# Altium PCB touch-24-v5.PcbDoc
Units mm, origin at the board's own origin, x right, y up, seen from the top; angles counter-clockwise.
Board outline 151 x 86.38 mm, 2 copper layers (Top Layer, Bottom Layer); 93 components, 79 nets, 232 pads, 43 vias.
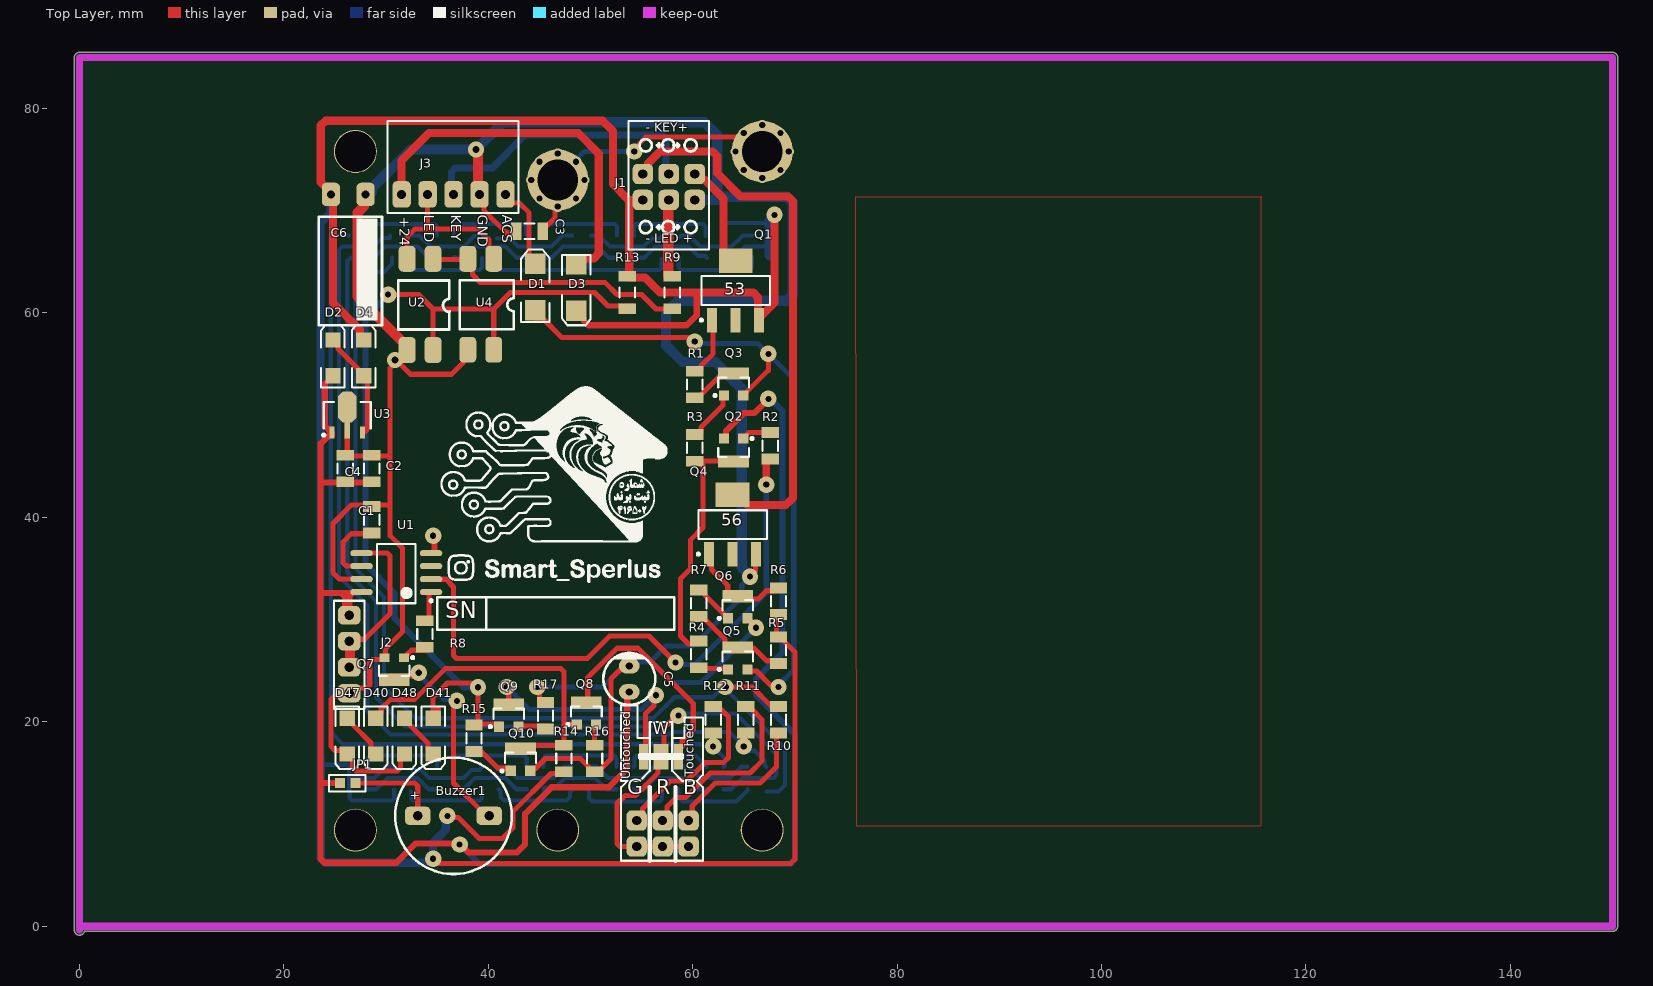
[diagram p0: Top Layer view]
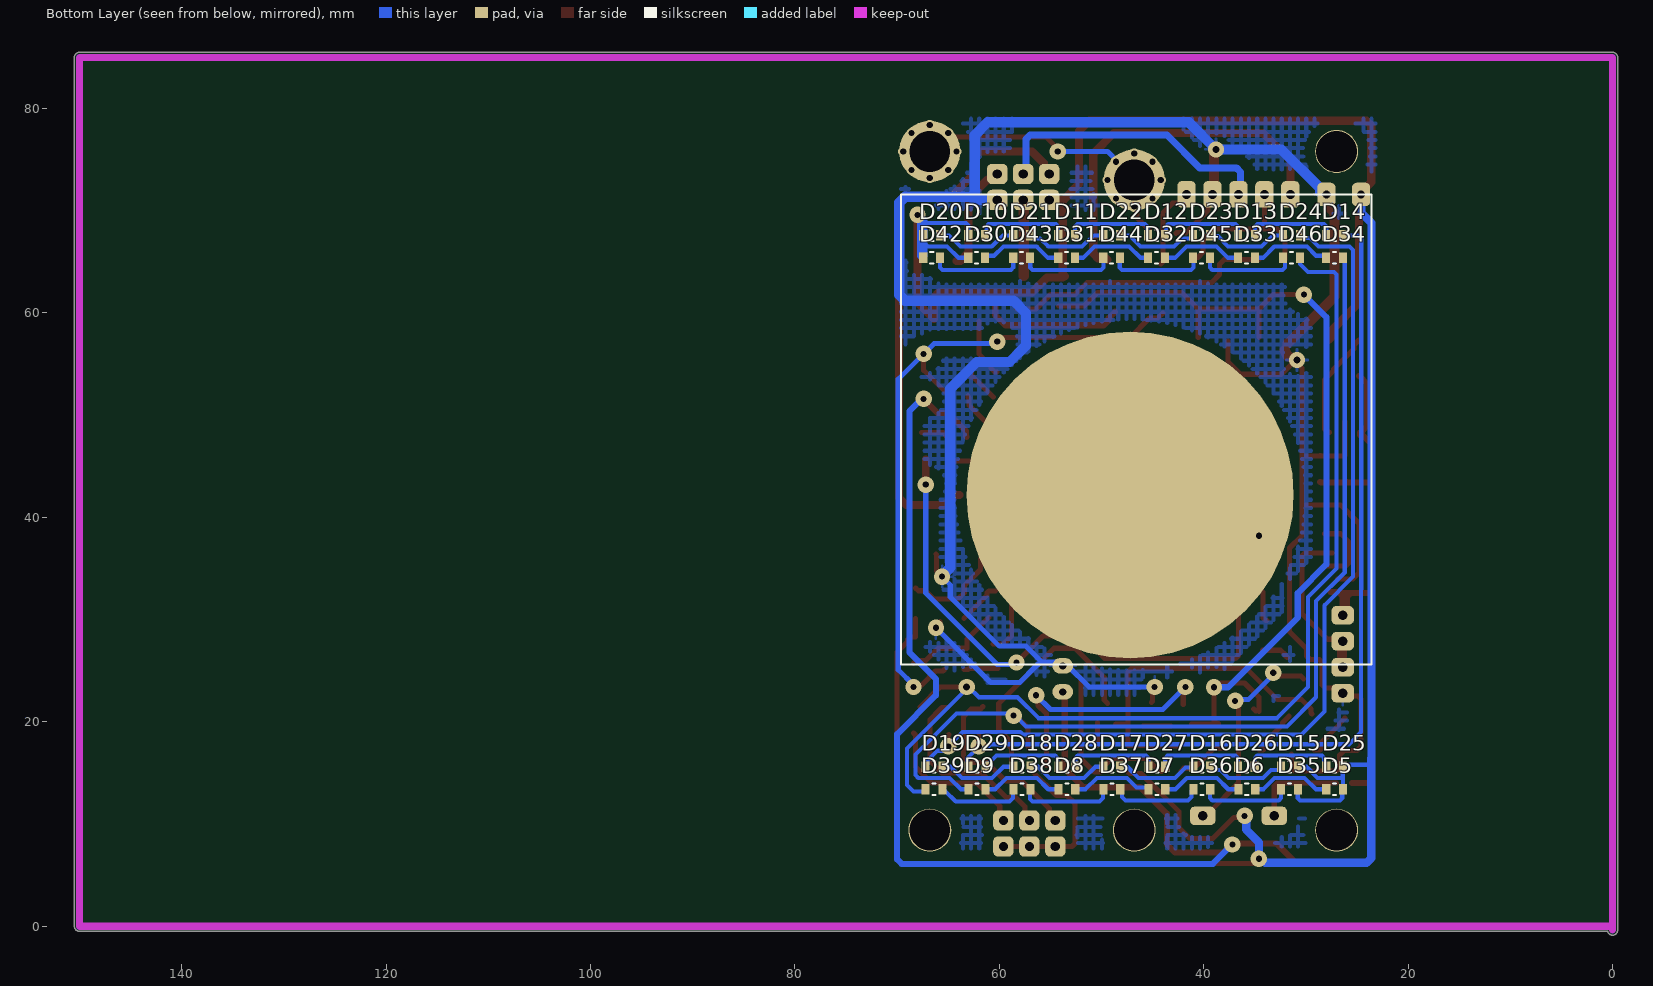
[diagram p1: Bottom Layer view, seen from below]

## Layer stack, top to bottom
Top Solder: solder mask 0.0102, Solder Resist, Dk 3.5
Top Layer: signal copper 0.0356
Dielectric 1: dielectric 0.32, FR-4, Dk 4.8
Bottom Layer: signal copper 0.0356
Bottom Solder: solder mask 0.0102, Solder Resist, Dk 3.5

## Board outline
-0.5,-0.381 -0.5,85 cw(c0,85) 0,85.5 150,85.5 cw(c150,85) 150.5,85 150.5,0 cw(c150,0) 150,-0.5 0.486,-0.5 cw(c0,-0.381)

## Design rules (kind name [scope] priority, off if disabled: settings)
Clearance Clearance_1 [InPolygon] p1: gap=1 ignorepadtopadclearanceinfootprint=FALSE
Clearance [All] p2: gap=0.4 ignorepadtopadclearanceinfootprint=FALSE
PolygonConnect [All] p1: connectstyle=Relief reliefconductorwidth=0.254 reliefentries=4 polygonreliefangle="90 Angle" airgapwidth=0.254
RoutingLayers [All] p1: top layer_v5=FALSE bottom layer_v5=TRUE
RoutingVias [All] p1: holewidth=0.711 width=2.5 viastyle="Through Hole" minholewidth=0.711 minwidth=1.27 maxholewidth=0.711 maxwidth=2
SolderMaskExpansion [All] p1: expansion=0.102 istentingtop=FALSE
Width [All] p1: maxlimit=3 minlimit=0.4 preferedwidth=1
29 further rules are at their usual default settings.

## Classes and differential pairs
component class touch-24-v5: Buzzer1 C1 C2 C3 C4 C5 C6 D1 D2 D3 D4 D5 D6 D7 D8 D9 D10 D11 D12 D13 D14 D15 D16 D17 D18 D19 D20 D21 D22 D23 D24 D25 D26 D27 D28 D29 D30 D31 D32 D33 D34 D35 D36 D38 D40 D41 D42 D44 D46 D47 J1 J3 J8 JP1 JP? P5 P7 Q1 Q2 Q3 Q4 Q5 Q6 Q7 Q8 Q9 Q10 R1 R2 R3 R4 R5 R6 R7 R8 R9 R10 R13 R14 R15 R16 R17 R22 U1 U2 U3 U4 U17

## Components (designator, comment, footprint, x,y, rotation, side; value= is the part's Value field where it differs from the comment)
Buzzer1 "Buzzer" BUZZER 36.6,10.8 r0 top
C1 "=Value" "CAP 1206" 26,44.8 r270 top
C2 "=Value" "CAP 1206" 28.6,44.8 r270 top
C3 "=Value" "CAP 1206" 44,68 r0 top
C4 "=Value" "CAP 1206" 28.6,39.8 r270 top
C5 "=Value" ELEC-CAP-RAD10-20 53.8,24.2 r270 top
C6 "=Value" ELEC-CAP-RAD15-30 26.4,69.6 r180 top
D1 "D Tunnel1" 3.2X1.6X1.1#1 44.6,62 r90 top
D2 "D Tunnel1" 3.2X1.6X1.1#2 24.8,55.6 r90 top
D3 "D Tunnel1" 3.2X1.6X1.1#3 48.6,62.75 r270 top
D4 "D Tunnel1" 3.2X1.6X1.1#2 27.8,55.6 r90 top
D5 "LED2" "RES 0805 (2012X06L)" 27.2,13.4 r0 bottom
D6 "LED2" "RES 0805 (2012X06L)" 35.8,13.4 r0 bottom
D7 "LED2" "RES 0805 (2012X06L)" 44.6,13.4 r0 bottom
D8 "LED2" "RES 0805 (2012X06L)" 53.4,13.4 r0 bottom
D9 "LED2" "RES 0805 (2012X06L)" 62.2,13.4 r0 bottom
D10 "LED2" "RES 0805 (2012X06L)" 62.2,67.6 r180 bottom
D11 "LED2" "RES 0805 (2012X06L)" 53.4,67.6 r180 bottom
D12 "LED2" "RES 0805 (2012X06L)" 44.6,67.6 r180 bottom
D13 "LED2" "RES 0805 (2012X06L)" 35.8,67.6 r180 bottom
D14 "LED2" "RES 0805 (2012X06L)" 27.2,67.6 r180 bottom
D15 "LED2" "RES 0805 (2012X06L)" 31.612,15.6 r0 bottom
D16 "LED2" "RES 0805 (2012X06L)" 40.2,15.6 r0 bottom
D17 "LED2" "RES 0805 (2012X06L)" 49,15.6 r0 bottom
D18 "LED2" "RES 0805 (2012X06L)" 57.8,15.6 r0 bottom
D19 "LED2" "RES 0805 (2012X06L)" 66.4,15.6 r0 bottom
D20 "LED2" "RES 0805 (2012X06L)" 66.6,67.6 r180 bottom
D21 "LED2" "RES 0805 (2012X06L)" 57.8,67.6 r180 bottom
D22 "LED2" "RES 0805 (2012X06L)" 49,67.6 r180 bottom
D23 "LED2" "RES 0805 (2012X06L)" 40.2,67.6 r180 bottom
D24 "LED2" "RES 0805 (2012X06L)" 31.4,67.6 r180 bottom
D25 "LED2" "RES 0805 (2012X06L)" 27.2,15.6 r0 bottom
D26 "LED2" "RES 0805 (2012X06L)" 35.838,15.6 r0 bottom
D27 "LED2" "RES 0805 (2012X06L)" 44.6,15.6 r0 bottom
D28 "LED2" "RES 0805 (2012X06L)" 53.4,15.6 r0 bottom
D29 "LED2" "RES 0805 (2012X06L)" 62.2,15.6 r0 bottom
D30 "LED2" "RES 0805 (2012X06L)" 62.2,65.4 r180 bottom
D31 "LED2" "RES 0805 (2012X06L)" 53.4,65.4 r180 bottom
D32 "LED2" "RES 0805 (2012X06L)" 44.6,65.4 r180 bottom
D33 "LED2" "RES 0805 (2012X06L)" 35.8,65.4 r180 bottom
D34 "LED2" "RES 0805 (2012X06L)" 27.2,65.4 r180 bottom
D35 "LED2" "RES 0805 (2012X06L)" 31.612,13.4 r0 bottom
D36 "LED2" "RES 0805 (2012X06L)" 40.2,13.4 r0 bottom
D37 "LED2" "RES 0805 (2012X06L)" 49,13.4 r0 bottom
D38 "LED2" "RES 0805 (2012X06L)" 57.8,13.4 r0 bottom
D39 "LED2" "RES 0805 (2012X06L)" 66.4,13.4 r0 bottom
D40 "D Tunnel1" 3.2X1.6X1.1#2 29,18.6 r270 top
D41 "D Tunnel1" 3.2X1.6X1.1#2 34.6,18.6 r270 top
D42 "LED2" "RES 0805 (2012X06L)" 66.6,65.4 r180 bottom
D43 "LED2" "RES 0805 (2012X06L)" 57.8,65.4 r180 bottom
D44 "LED2" "RES 0805 (2012X06L)" 49,65.4 r180 bottom
D45 "LED2" "RES 0805 (2012X06L)" 40.2,65.4 r180 bottom
D46 "LED2" "RES 0805 (2012X06L)" 31.4,65.4 r180 bottom
D47 "D Tunnel1" 3.2X1.6X1.1#2 26.2,18.6 r270 top
D48 "D Tunnel1" 3.2X1.6X1.1#2 31.8,18.6 r270 top
J1 "Header3X2" "HEADER 3X2" 55.12,73.6 r0 top
J2 "Header4X1" "HEADER 4X1" 26.4,30.42 r270 top
J3 "Header5X1" "HEADER 5X1" 31.52,71.6 r0 top
J4 "Header3X2" "HEADER 3X2" 59.6,7.8 r180 top
JP1 "Jumper" "Header 2X1" 26.2,14 r180 top
JP2 "Jumper Selector" "Jumper Selector"#1 59.38,15.8 r180 top
JP3 "Jumper Selector" "Jumper Selector"#2 59.44,17.4 r180 top
Q1 "MOSFET-P4" SOT223_N 64.2,62.2 r90 top
Q2 "PNP" SOT-23B_N 64,46.6 r270 top
Q3 "QNPN" SOT-23B_L#1 64,53 r90 top
Q4 "MOSFET-P4" SOT223_N 63.9,39.3 r90 top
Q5 "QNPN" SOT-23B_L#1 64.4,26.2 r90 top
Q6 "QNPN" SOT-23B_L#1 64.4,31.2 r90 top
Q7 "QNPN" SOT-23B_L#2 30.8,25.2 r270 top
Q8 "QNPN" SOT-23B_L#1 49.6,20.8 r90 top
Q9 "QNPN" SOT-23B_L#1 42,20.6 r90 top
Q10 "QNPN" SOT-23B_L#1 43.15,16.275 r90 top
R1 "10K" "RES 1206 (3216X08L)"#1 60.2,53 r90 top
R2 "10K" "RES 1206 (3216X08L)"#1 67.6,47 r90 top
R3 "10K" "RES 1206 (3216X08L)"#1 60.2,46.8 r90 top
R4 "10K" "RES 1206 (3216X08L)"#1 60.6,26.6 r270 top
R5 "10K" "RES 1206 (3216X08L)"#1 68.4,27 r90 top
R6 "10K" "RES 1206 (3216X08L)"#1 68.4,31.8 r90 top
R7 "10K" "RES 1206 (3216X08L)"#1 60.6,31.6 r90 top
R8 "10K" "RES 1206 (3216X08L)"#1 33.8,28.6 r270 top
R9 "10K" "RES 1206 (3216X08L)"#2 58,62 r270 top
R10 "10K" "RES 1206 (3216X08L)"#1 68.4,20.2 r90 top
R11 "10K" "RES 1206 (3216X08L)"#1 65.2,20.2 r270 top
R12 "10K" "RES 1206 (3216X08L)"#1 62,20.2 r270 top
R13 "10K" "RES 1206 (3216X08L)"#2 53.6,62 r90 top
R14 "10K" "RES 1206 (3216X08L)"#1 47.4,16.4 r270 top
R15 "10K" "RES 1206 (3216X08L)"#1 38.6,18.4 r270 top
R16 "10K" "RES 1206 (3216X08L)"#1 50.4,16.4 r90 top
R17 "10K" "RES 1206 (3216X08L)"#1 45.6,20.6 r270 top
U1 "ATtiny15L-1SC" 8S2_N 31,34.6 r180 top
U2 "PC817" DIP4#1 34.6,64.6 r270 top
U3 "LM1117MP-3.3" SOT89L 26.2,50 r90 top
U4 "PC817" DIP4#2 40.54,64.62 r270 top

## Footprints (in the part's own frame and the unit in brackets; to place one, negate y for a bottom-side part, rotate by r counter-clockwise, add the part's x,y. Pads: shape width x height; smd on the part's side, far side on the other; paste and mask are expansions set on the pad)
3.2X1.6X1.1#1 [mm] "SMT LED; 2 Flat Leads"
  rect 2x2 smd: 1(-1.75,0) 2(2.8,0)
  silkscreen extent -2.9,-1.4 4.2,1.4
3.2X1.6X1.1#2 [mm] "SMT LED; 2 Flat Leads"
  rect 1.5x1.5 smd: 1(-1.75,0) 2(1.75,0)
  silkscreen extent -2.9,-1.15 3.2,1.15
3.2X1.6X1.1#3 [mm] "SMT LED; 2 Flat Leads"
  rect 2x2 smd: 1(-2,0) 2(2.55,0)
  silkscreen extent -2.9,-1.4 3.95,1.4
8S2_N [mm] "SOP, 8-Leads, Body 5.3x5.3mm, Pitch 1.27mm, IPC Medium Density"
  oval 2.2x0.6 smd: 1(-3.4,1.905) 2(-3.4,0.635) 3(-3.4,-0.635) 4(-3.4,-1.905) 5(3.4,-1.905) 6(3.4,-0.635) 7(3.4,0.635) 8(3.4,1.905)
  silkscreen extent -3.52,-2.8 1.9,3, body extent -2.73,-2.75 2.73,2.75, height 2.16
BUZZER [mm] "BUZZER"
  rrect50% 2.5x1.8 hole 0.9: 1(-3.5,0) 2(3.5,0)
  silkscreen extent -5.7,-5.7 5.7,5.7
"CAP 1206" [mm]
  rect 1.05x1.7 smd: 1(-1.27,0) 2(1.326,0)
  silkscreen extent -0.47,-0.75 0.53,0.75, body extent -1.49,-0.77 1.55,0.75, height 0.75
DIP4#1 [mm]
  rrect50% 2.54x1.651 smd: 1(-0.7,0) 2(-0.7,-2.54) 3(8.22,-2.54) 4(8.22,0)
  silkscreen extent 1.42,-3.4 6.22,1.65, body extent -0.13,-3.56 7.75,1.03, height 4.3
DIP4#2 [mm]
  rrect50% 2.54x1.651 smd: 1(-0.68,0) 2(-0.68,-2.54) 3(8.22,-2.54) 4(8.22,0)
  silkscreen extent 1.42,-3.34 6.22,1.96, body extent -0.13,-3.56 7.75,1.03, height 4.3
ELEC-CAP-RAD10-20 [mil] "Chip Capacitor, 2-Leads, Body 3.2x1.6mm, IPC High Density, chip Tantalum"
  oval 60x80 hole 27.56: 1(-50,0) 2(50,0)
  silkscreen extent -100,-100 100,100, body extent -124,-124 124,124, height 404
ELEC-CAP-RAD15-30 [mil]
  rrect50% 70x90 hole 30: 1(-62.99,-78.74) 2(70.87,-78.74)
  silkscreen extent -108,16 -29,406, body extent -167,-167 167,167, height 609
"Header 2X1" [mm]
  rect 1x1 smd: 1(-0.8,0) 2(0.7,0)
  silkscreen extent -1.8,-0.8 1.8,0.8, body extent -2.54,-1.27 2.54,1.27, height 9.5
"HEADER 3X2" [mm]
  rrect50% 2x2 hole 0.9: 1(0,0) 2(0,-2.54) 3(2.54,0) 4(2.54,-2.54) 5(5.08,0) 6(5.08,-2.54)
  silkscreen extent -1.4,-7.4 6.48,5.2, body extent -1.3,-3.81 6.32,1.27, height 8.38
"HEADER 4X1" [mm]
  rrect50% 1.8x2.2 hole 0.9: 1(0,0) 2(2.54,0) 3(5.08,0) 4(7.62,0)
  silkscreen extent -1.43,-1.5 9.18,1.5, body extent -1.19,-1.22 8.97,1.32, height 8.38
"HEADER 5X1" [mm]
  rrect50% 1.8x2.6 hole 0.9: 1(0,0) 2(2.54,0) 3(5.08,0) 4(7.62,0) 5(10.16,0)
  silkscreen extent -1.4,-1.8 11.46,7.2, body extent -1.22,-1.19 11.48,1.35, height 8.38
"Jumper Selector"#1 [mm]
  rect 1.5x0.9 smd: 1(2.48,0)
  rect 0.9x0.9 smd: 2(0.78,0) 3(4.18,0)
  body extent -1.24,-1.27 6.38,1.27, height 10.16
"Jumper Selector"#2 [mm]
  rect 1.5x0.9 smd: 1(2.54,0)
  rect 0.9x0.9 smd: 2(0.84,0) 3(4.24,0)
  body extent -1.24,-1.27 6.38,1.27, height 10.16
"RES 0805 (2012X06L)" [mm] "Chip Resistor, 2-Leads, Body 2.0x1.3mm, IPC High Density _ (0.100 W)"
  rect 0.8x1 smd: 1(-0.838,0) 2(0.812,0)
  silkscreen extent -0.16,-0.55 0.14,0.55, body extent -1.03,-0.63 1,0.64, height 0.6
"RES 1206 (3216X08L)"#1 [mm] "Chip Resistor, 2-Leads, Body 3.2x1.6mm, IPC High Density _ (0.125 W)"
  rect 1.05x1.7 smd: 1(-1.295,0) 2(1.301,0)
  silkscreen extent -0.5,-0.75 0.5,0.75, body extent -1.52,-0.76 1.53,0.76, height 0.6
"RES 1206 (3216X08L)"#2 [mm] "Chip Resistor, 2-Leads, Body 3.2x1.6mm, IPC High Density _ (0.125 W)"
  rect 1.05x1.7 smd: 1(-1.6,0) 2(1.6,0)
  silkscreen extent -0.5,-0.75 0.5,0.75, body extent -1.52,-0.76 1.53,0.76, height 0.6
SOT89L [mm] "SOT89, 3-Leads, Body 4.5x2.4 mm, Pitch 1.5mm, Lead Span 4.1mm, IPC High Density"
  rect 1.2x0.5 smd: 1(-1.7,1.5) 3(-1.7,-1.5)
  rect 1.6x0.5 smd: 2(-1.5,0)
  oct 3x1.8 smd: 2(0.8,0)
  silkscreen extent -2.07,-2.3 1.3,2.42, body extent -1.3,-2.3 1.3,2.3, height 1.6
SOT223_N [mm] "SOT223, 4-Leads, Body 6.5x3.5mm, Pitch 2.3mm, Lead Span 7mm, IPC Medium Density"
  rect 2.4x1 smd: 1(-2.9,2.3) 2(-2.9,0) 3(-2.9,-2.3)
  rect 2.4x3.3 smd: 4(2.9,0)
  silkscreen extent -3.02,-3.35 1.4,3.47, body extent -1.85,-3.35 1.85,3.35, height 1.7
SOT-23B_L#1 [mm] "SOT23, 3-Leads, Body 2.9x1.3mm, Pitch 0.95mm, Lead Span 2.4mm, IPC High Density"
  rect 1x1 smd: 1(-1.075,0.95) 2(-1.075,-0.95)
  rect 1.2x3 smd: 3(1.075,0)
  silkscreen extent -1.2,-1.5 0.7,1.92, body extent -0.7,-1.5 0.7,1.5, height 1.14
SOT-23B_L#2 [mm] "SOT23, 3-Leads, Body 2.9x1.3mm, Pitch 0.95mm, Lead Span 2.4mm, IPC High Density"
  rect 0.85x1 smd: 1(-1.075,0.95) 2(-1.075,-0.95)
  rect 1.2x3 smd: 3(1.075,0)
  silkscreen extent -1.2,-1.5 0.7,1.93, body extent -0.7,-1.5 0.7,1.5, height 1.14
SOT-23B_N [mm] "SOT23, 3-Leads, Body 2.9x1.3mm, Pitch 0.95mm, Lead Span 2.4mm, IPC Medium Density"
  rect 1x1 smd: 1(-1.125,0.95) 2(-1.125,-0.95)
  rect 1.2x3 smd: 3(1.125,0)
  silkscreen extent -1.25,-1.5 0.7,1.93, body extent -0.7,-1.5 0.7,1.5, height 1.14

## Part data
C1 C2 C3 C4: library part Capacitor, "Capacitor"
C5 C6: library part "Capacitor Electrolytic", "Electrolytic Capacitor"
D1 D2 D3 D4 D40 D41 D47 D48: "Tunnel Diode - RLC Model", LatestRevisionDate=17-Jul-2002, LatestRevisionNote="Re-released for DXP Platform.", PackageDescription="SM LED; 2 Flat Leads", PackageReference=3.2X1.6X1.1, PackageVersion=Feb-2002, Published=8-Jun-2000, Publisher="Altium Limited"
D5 D6 D7 D8 D9 D10 D11 D12 D13 D14 D15 D16 D17 D18 D19 D20 D21 D22 D23 D24 D25 D26 D27 D28 D29 D30 D31 D32 D33 D34 D35 D36 D37 D38 D39 D42 D43 D44 D45 D46: "Typical RED, GREEN, YELLOW, AMBER GaAs LED", LatestRevisionDate=17-Jul-2002, LatestRevisionNote="Re-released for DXP Platform.", PackageDescription="SM LED; 2 Flat Leads", PackageReference=3.2X1.6X1.1, PackageVersion=Feb-2002, Published=8-Jun-2000, Publisher="Altium Limited"
Q1 Q4: "P-Channel MOSFET, Externally Terminated Substrate", Code_IPC=SOT223-4, Code_JEDEC=TO-261-AA-B, Code_JEITA=SC-75, LatestRevisionDate=29-May-2009, LatestRevisionNote="IPC-7351 Footprint Added.", PackageDescription="4-Pin SOT-223 Package 2.3 mm Pitch, 7 mm Lead Span", PackageReference=SOT223, PackageVersion=2002, Published=24-Mar-1999, Publisher="Altium Limited"
Q2: "PNP Bipolar Transistor", LatestRevisionDate=29-May-2009, LatestRevisionNote="IPC-7351 Footprint Added.", PackageDescription="3-Pin SOT-23 Package 0.95 mm Pitch, 2.4 mm Lead Span", PackageReference=SOT-23B, PackageVersion=Aug-1999, Published=8-Jun-2000, Publisher="Altium Limited"
Q3 Q5 Q6 Q7 Q8 Q9 Q10: "NPN Bipolar Transistor", LatestRevisionDate=29-May-2009, LatestRevisionNote="IPC-7351 Footprint Added.", PackageDescription="3-Pin SOT-23 Package 0.95 mm Pitch, 2.4 mm Lead Span", PackageReference=SOT-23B, PackageVersion=Aug-1999, Published=8-Jun-2000, Publisher="Altium Limited"
R1 R2 R3 R4 R5 R6 R7 R8 R9 R10 R11 R12 R13 R14 R15 R16 R17: library part Resistor, "Resistor", Power="1/4 W", Tolerance=5%
U1: "8-Bit AVR Microcontroller with 1K Byte of Flash Memory", Supplier Part Number 1=ATTINY15L-1SC-ND, ComponentLink1Description=Datasheet, ComponentLink1URL=http://www.atmel.com/dyn/resources/prod_documents/doc1187.pdf, ComponentLink2Description="Atmel.com Home", ComponentLink2URL=http://www.atmel.com, DatasheetVersion=1187E-AVR-06/02, LatestRevisionDate=16-Oct-2006, LatestRevisionNote="IPC-7351 Footprint Added.", PackageDescription="8-Lead, 0.208\" Body, Plastic Small Outline Package (EIAJ)", PackageReference=8S2, PackageVersion="revF, Apr-2008", Published=17-Sep-2003, Publisher="Altium Limited", Supplier 1=Digi-Key, Supplier 2=Mouser, Supplier Part Number 2=556-ATTINY15L1SC
U2 U4: library part OPTCOUPLER_01, "4-Pin Phototransistor Optocoupler"
U3: "800mA Low-Dropout Linear Regulator", DigiKeyPartNumber=LM1117MP-3.3CT-ND, Manufacturer="National Semiconductor", PackageTopMarking=XYTT*N05A, PowerWise=N, Code_IPC=SOT223-4, Code_JEDEC=TO-261-AA, ComponentLink1Description="LM1117 Datasheet", ComponentLink1URL=http://www.national.com/ds/LM/LM1117.pdf, ComponentLink2Description="LM1117 Web Page", ComponentLink2URL=http://www.national.com/pf/LM/LM1117.html, ComponentLink3Description="MP04A Package Page", ComponentLink3URL=http://www.national.com/packaging/folders/mp04a.html, CompType="LDO IC", DatasheetVersion=Apr-2006, PackageDescription="Molded SOT-223, 6.50 x 3.56 x 1.6mm Body, 4 Lead, 2.3mm Pitch", PackageReference=MP04A, PackageVersion="revB, Apr-2003", PartNumber=LM1117MP-3.3, PinCount=4, Published=4-Dec-2008, Publisher="Altium Limited", RoHS=O
Buzzer1: ComponentLinkURL=www.picpars.com, Designer="Seyed Mohsen Ghasemain"

## Free pads (board coordinates)
  round 4.2 hole 4: 2(27,75.8) 2(66.8,9.4) 3(27,9.4) 4(46.8,9.4)
  round 6 hole 4: 5(46.8,73) 5(66.8,75.8)
  round 32 smd far side: 6(47.2,42.2)

## Via types
v1: diameter 1.6, hole 0.6, Top Layer to Bottom Layer, 24 vias
v2: diameter 1, hole 0.6, Top Layer to Bottom Layer, 16 vias
v3: diameter 1.6, hole 0.711, Top Layer to Bottom Layer, 3 vias

## Nets (pads, with @x,y where several pads share a name; then routed paths per layer and width w, separated by ;. In a path a pad name is that pad's centre, name@x,y a point inside that pad or via, vN(x,y) a via of type N, cw(c..) or ccw(c..) an arc to the next point about the centre after c; other vN are vias at no path point)
ACS: D1.2 J3.5 | length 8.3
  Top Layer w0.5: J3.5 41.68,71.396 42.315,70.761 43.039,70.761 44,69.8 44,65 D1.2@44.2,64.8
bizer: R8.1 U1.1 | length 3
  Top Layer w0.5: R8.1 33.925,29.895 34.2,30.17 U1.1@34.2,32.695
data-rf: J2.2 J2.3 U1.5 | length 15.1
  Top Layer w0.5: J2.2@26.6,28.08 27.88,28.08 30.4,30.6 30.4,36.212 30.107,36.505 U1.5@27.4,36.505
  Top Layer w1: J2.2 26.46,27.88 26.46,26.425
GND: C1.1 C2.1 C3.1 C4.1 C5.1 C6.1 D47.2 D48.2 J1.6 J2.4 J3.4 Q4.3 Q6.2 Q7.2 Q10.2 R16.1 R17.1 U1.7 U2.3 U3.2 U4.3 | length 284.6
  Top Layer w0.5: U3.2@26.2,49.4 26.2,48.5 26.2,46.07 26.27,46 28.53,46 C2.1 28.67,46 30.4,46 ; J2.4 26.899,23.299 28.107,23.299 28.4,23.591 28.4,25.807 28.693,26.1 29.605,26.1 29.955,26.45 29.955,27.155 31.6,28.8 31.6,37 30.4,38.2 30.4,41.2 ; J2.4@26.516,22.8 26.226,22.51 24.893,22.51 24.6,22.217 24.6,17.6 25,17.2 26.25,17.2 26.7,16.75 26.7,15.493 26.993,15.2 31.107,15.2 31.4,15.493 D48.2@31.4,16.85 ; U1.7@26.89,33.984 25.404,33.984 24.8,34.588 24.8,39.4 26.6,41.2 28.6,41.2 30.4,41.2 ; U2.3@31.326,55.586 31.063,55.586 v3(30.877,55.4) 31,55.4 v3@31.1,55.3 ; U2.3@32,56.2 U2.3@32,57.2 ; U4.3@37.643,57.243 37.643,55.243 36.4,54 32.4,54 v3@31.1,55.3 ; J3.4 39.569,71.171 39.569,70.031 41.748,67.852 42.678,67.852 C3.1@42.73,67.8 ; Q10.2@44.15,15.125 44.4,15.375 44.575,15.375 45.6,16.4 49,16.4 49.8,15.6 49.8,15.38 50.1,15.08 50.7,15.08 51,15.38 52,16.38 52,24.2 53.27,25.47 C5.1 ; v1(44.8,23.4) 45,23.2 45,22.01 R17.1@45.105,21.905 ; v1(65.6,34.2) 66.143,34.743 66.143,36.343 Q4.3 ; Q6.2@65.8,29.8 v1@65.8,29.2 ; v1(66.2,29.2) v1@65.8,29.2 ; 30.4,41.2 30.4,46 ; 30.4,46 30.4,54.6 v3@31.1,55.3 ; v1@65.8,29.2 65.8,29.075 65.675,29.2 v1@65.8,29.2
  Top Layer w1: 27.821,70.421 27.2,69.8 27.2,61.6 U2.3@31.808,56.992 ; v3(30.877,55.4) 31.326,55.586 31.618,55.708 31.833,55.797 31.922,56.012 31.937,56.048 32,56.2 32.067,56.363 U2.3 ; v3(38.8,76) 38.8,75.865 39,75.665 39,71.74 J3.4
  Bottom Layer w0.5: v1(44.8,23.4) 51.2,23.4 53.27,25.47 C5.1 ; C5.1@54.213,25.866 55.866,25.866 ; 56.3,25.5 55.934,25.866 55.866,25.866 ; 56.4,25.4 56.45,25.4 58,23.85 60.85,23.85 v1(66.2,29.2) ; v1(65.6,34.2) 64.8,33.4 64.8,32.2 60,27.4 57.4,27.4 55.866,25.866
  Bottom Layer w1: C6.1@28.2,71.4 28.589,71.789 28.589,72.189 32.4,76 v3(38.8,76) 41.45,78.65 61.15,78.65 62.4,77.4 62.4,71.365 69.214,71.365 69.8,70.779 69.8,61.786 69.214,61.2 58.6,61.2 57.4,60 57.4,56.8 59,55.2 62.2,55.2 64.8,52.6 64.8,35.086 65.6,34.286 v1(65.6,34.2) ; J3.4@39.08,71.66 J3.4 ; J1.6 62.4,71.06
key: J1.3 J3.3 | length 29.2
  Bottom Layer w0.7: J3.3@36.4,70.693 36.4,73.79 36.81,74.2 40.4,74.2 43.6,77.4 56.99,77.4 57.4,76.99 J1.3@57.4,73.6
key+: J1.5 Q1.4 | length 10.9
  Top Layer w0.8: J1.5@59.94,73.6 60.478,73.062 61.138,73.062 63,71.2 63,65.9 63.8,65.1 Q1.4
key-: J1.1 Q4.4 | length 54.1
  Top Layer w0.8: J1.1@55.066,73.6 J1.1@55.658,74.192 ; 55.658,74.658 56.8,75.8 61.931,75.8 62.4,75.331 62.4,73.697 64.697,71.4 69.331,71.4 69.8,70.931 69.8,41.893 69.107,41.2 65.35,41.2 64.35,42.2 Q4.4
L1: J4.1 J4.3 J4.5 JP2.1 | length 17.4
  Top Layer w0.5: JP2.1@57.1,15.8 56.82,15.8 56.62,15.6 56.62,15.02 54.4,12.8 53.4,12.8 52.6,12 52.6,8.093 52.893,7.8 J4.5 J4.3 J4.1
L11: D19.2 D24.2 R11.2 | length 95.1
  Top Layer w0.5: R11.2@64.934,18.765 65.2,18.499 65,18.299 v1(65,17.6)
  Bottom Layer w0.4: D24.2@30.388,67.6 30.388,67.32 29.588,67.32 28.769,66.5 25.74,66.5 25.388,66.149 25.388,34.212 28.2,31.4 28.2,21 30.45,18.75 57.701,18.75 57.951,19 63.6,19 v1(65,17.6) 65.43,17.17 66.03,17.17 67.012,16.188 67.012,15.8 D19.2
L12: D14.2 D29.2 R12.2 | length 92.1
  Top Layer w0.5: v1(62,17.6) R12.2
  Bottom Layer w0.4: D14.2 24.834,67.6 24.588,67.354 24.588,33.012 24.6,33 24.6,19 25.8,17.8 60.875,17.8 61.075,17.6 v1(62,17.6) 63.134,16.466 63.134,15.723 D29.2
L13: D39.2 D46.2 R10.2 | length 101.5
  Top Layer w0.5: v3(63.2,23.4) 65.8,23.4 R10.2@67.733,21.467
  Bottom Layer w0.4: D46.2 30.588,64.788 29.8,64 27.234,64 27,63.766 27,35 29.8,32.2 29.8,23.4 32.85,20.35 56.15,20.35 58.2,22.4 62,22.4 63,23.4 v3(63.2,23.4) 63.2,23.2 69.012,17.388 69.012,13.812 68.4,13.2 D39.2@67.212,13.2
led: D41.1 Q9.1 R13.1 R15.1 U2.4 U4.4 | length 89.2
  Top Layer w0.5: v1(30.2,61.8) 33.2,61.8 34.6,60.4 ; D41.1@34.6,21 34.6,22.4 36,23.8 38.357,23.8 v1@38.889,23.268 ; U2.4@34.6,57.6 34.6,60.4 ; D41.1@34.911,21.061 35.1,21.25 ; R15.1 38.561,19.833 38.762,19.891 39,20.129 v1(39,23.379) ; R15.1@38.661,19.8 Q9.1@41.182,19.8 ; 40.42,60.4 34.6,60.4 ; U4.4@40.54,57.6 40.54,60.4 42.14,62 50.4,62 51.725,60.675 R13.1@54.2,60.675
  Bottom Layer w0.6: v1(30.2,61.8) 28,59.6 28,35.4 30.8,32.6 30.8,30.2 37.621,23.379 v1(39,23.379)
"led IN": J3.2 U2.2 U4.1 | length 16.3
  Top Layer w0.5: U2.2@32.06,65.22 32.06,67.46 32.8,68.2 34.06,68.2 ; J3.2 34.06,68.2 ; U4.1@40.57,65.43 40.065,65.935 40.065,67.135 39,68.2 34.06,68.2
Lw: D9.2 D34.2 JP3.1 | length 98.5
  Top Layer w0.5: JP3.1@57.1,17.4 57.1,17.5 57.2,17.6 57.2,19.4 58.4,20.6 v1(58.6,20.6)
  Bottom Layer w0.4: D34.2@26.5,65.4 26.2,65.1 26.2,34.6 29,31.8 29,22.4 31.85,19.55 57.37,19.55 58.42,20.6 v1(58.6,20.6) ; v1@58.656,20.544 58.911,20.8 64.2,20.8 68.212,16.788 68.212,14.782 67.93,14.5 64.862,14.5 63.763,13.4 D9.2
NetBuzzer1_1: Buzzer1.1 JP1.1 | length 9.1
  Top Layer w0.5: JP1.1 32.807,14 33.1,13.707 Buzzer1.1
NetBuzzer1_2: Buzzer1.2 Q7.3 | length 20
  Top Layer w0.5: Q7.3@30.234,24.2 30.509,24.475 32.577,24.475 32.902,24.8 v1(33.2,24.8) ; v1(36.922,22.052) 36.922,21.824 36.6,21.502 36.6,14 39.4,11.2 Buzzer1.2@39.5,11.2
  Bottom Layer w0.5: v1@33.336,24.464 35.6,22.2 36.774,22.2 v1(36.922,22.052)
NetC4_2: C4.2 U1.6 | length 7.3
  Top Layer w0.5: C4.2@28.2,38.4 26.6,38.4 25.8,37.6 25.8,35.547 26.093,35.254 U1.6@28.242,35.254
NetD1_1: D1.1 Q3.2 Q5.2 | length 68.6
  Top Layer w0.5: D1.1@43.986,60 44.486,59.5 45.3,59.5 47.2,57.6 59.529,57.6 59.929,57.2 v1(60.2,57.2) ; Q3.2@64.65,51.825 64.825,51.825 65.075,52.075 65.1,52.075 65.2,52.175 65.2,52.2 67.4,54.4 v1(67.4,56) ; Q5.2 65.518,24.957 66.243,24.957 67.59,23.61 68.189,23.61 v1(68.4,23.4)
  Bottom Layer w0.5: v1@60,57 66.4,57 v1(67.4,56) 69.885,53.515 69.885,25.085 68.4,23.6 v1(68.4,23.4)
NetD2_2: D2.2 D4.1 U3.3 | length 10.9
  Top Layer w0.5: D2.2 25.3,56.85 25.3,56.5 27.3,54.5 27.3,54.35 D4.1 ; U3.3 27.75,48.35 27.907,48.35 28.2,48.643 28.2,53.45 D4.1@27.7,53.95
NetD3_1: D3.1 J3.1 | length 36
  Top Layer w0.8: J3.1 31.52,74.92 34.2,77.6 48.8,77.6 50.8,75.6 50.8,65.819 50.331,65.35 49.55,65.35 D3.1@49.4,65.2
NetD5_2: D5.2 D6.1 | length 7.9
  Bottom Layer w0.4: D5.2 29.025,13.4 30.125,14.5 33.072,14.5 34.168,13.404 34.958,13.404 D6.1
NetD6_2: D6.2 D7.1 | length 8.1
  Bottom Layer w0.4: D6.2 37.6,13.4 38.7,14.5 40.363,14.5 41.66,14.5 42.76,13.4 D7.1
NetD7_2: D7.2 D8.1 | length 8.1
  Bottom Layer w0.4: D7.2 45.576,13.564 46.577,13.564 47.513,14.5 49.68,14.5 50.46,14.5 51.556,13.404 52.558,13.404 D8.1
NetD8_2: D8.2 D9.1 | length 8.1
  Bottom Layer w0.4: D8.2 55.213,13.4 56.313,14.5 59.3,14.5 60.4,13.4 D9.1
NetD10_2: D10.2 D11.1 | length 9
  Bottom Layer w0.4: D11.1 54.238,68.466 54.473,68.7 61.038,68.7 61.272,68.466 D10.2@61.272,67.516
NetD11_2: D11.2 D12.1 | length 9
  Bottom Layer w0.4: D12.1 45.521,67.683 45.521,68.466 45.755,68.7 52.354,68.7 52.588,68.466 D11.2
NetD12_2: D12.2 D13.1 | length 9
  Bottom Layer w0.4: D13.1 36.638,68.466 36.873,68.7 43.471,68.7 43.705,68.466 43.705,67.683 D12.2
NetD13_2: D13.2 D14.1 | length 8.9
  Bottom Layer w0.4: D14.1 28,67.638 28,68.466 28.234,68.7 34.754,68.7 34.988,68.466 D13.2
NetD15_2: D15.2 D16.1 | length 7.8
  Bottom Layer w0.4: D15.2@32.424,15.4 32.524,15.3 33.403,15.3 34.203,14.5 37.569,14.5 38.369,15.3 39.162,15.3 39.374,15.512 D16.1@39.374,15.6
NetD16_2: D16.2 D17.1 | length 8.1
  Bottom Layer w0.4: D16.2 41.098,15.514 41.777,15.514 42.792,14.5 46.382,14.5 47.482,15.6 D17.1
NetD17_2: D17.2 D18.1 | length 7.7
  Bottom Layer w0.4: D17.2 50.6,15.6 51.7,14.5 55.1,14.5 56.2,15.6 56.562,15.6
NetD18_2: D18.2 D19.1 | length 7.7
  Bottom Layer w0.4: D18.2 59.6,15.6 60.7,14.5 63.66,14.5 64.76,15.6 D19.1@65.362,15.6
NetD20_2: D20.2 D21.1 | length 8.1
  Bottom Layer w0.4: D21.1@58.638,67.4 58.838,67.6 59.64,67.6 60.74,66.5 63.808,66.5 64.908,67.6 D20.2
NetD21_2: D21.2 D22.1 | length 8
  Bottom Layer w0.4: D22.1@50.038,67.6 50.042,67.596 50.804,67.596 51.9,66.5 55.208,66.5 56.008,67.3 56.788,67.3 D21.2@57.118,67.63
NetD22_2: D22.2 D23.1 | length 8.1
  Bottom Layer w0.4: D23.1@40.838,67.3 42.1,67.3 42.9,66.5 46.169,66.5 47.264,67.596 D22.2@48.196,67.596
NetD23_2: D23.2 D24.1 | length 8.4
  Bottom Layer w0.4: D24.1@32.038,67.3 32.338,67.6 33.24,67.6 34.34,66.5 37.608,66.5 38.623,67.514 39.302,67.514 D23.2
NetD25_2: D25.2 D26.1 | length 8.8
  Bottom Layer w0.4: D25.2 28.212,15.8 28.212,16.466 28.446,16.7 34.766,16.7 35,16.466 D26.1
NetD26_2: D26.2 D27.1 | length 9
  Bottom Layer w0.4: D26.2 36.65,16.466 36.884,16.7 43.527,16.7 43.762,16.466 D27.1
NetD27_2: D27.2 D28.1 | length 9.1
  Bottom Layer w0.4: D27.2 45.412,16.466 45.646,16.7 52.327,16.7 52.562,16.466 D28.1
NetD28_2: D28.2 D29.1 | length 8.6
  Bottom Layer w0.4: D28.2 54.295,15.683 54.295,16.466 54.529,16.7 60.262,16.7 61.062,15.9 61.162,15.9 61.362,15.7 D29.1
NetD30_2: D30.2 D31.1 | length 8.1
  Bottom Layer w0.4: D31.1@54.242,65.504 54.334,65.504 54.438,65.4 55.24,65.4 56.34,66.5 59.608,66.5 60.508,65.6 61.188,65.6 D30.2
NetD31_2: D31.2 D32.1 | length 8.1
  Bottom Layer w0.4: D32.1 45.442,65.404 46.204,65.404 47.3,66.5 50.7,66.5 51.8,65.4 D31.2
NetD32_2: D32.2 D33.1 | length 8.1
  Bottom Layer w0.4: D33.1@36.638,65.488 36.75,65.488 36.838,65.4 37.64,65.4 38.74,66.5 41.7,66.5 42.8,65.4 D32.2
NetD33_2: D33.2 D34.1 | length 7.2
  Bottom Layer w0.4: D34.1@28.232,65.593 28.237,65.599 28.999,65.599 29.9,66.5 33.1,66.5 34.2,65.4 D33.2@34.588,65.4
NetD35_2: D35.2 D36.1 | length 8.7
  Bottom Layer w0.4: D35.2@32.424,13.2 32.424,12.534 32.658,12.3 39.166,12.3 39.4,12.534 D36.1@39.4,13.369
NetD36_2: D36.2 D37.1 | length 8.7
  Bottom Layer w0.4: D36.2@41.024,13.4 41.195,13.229 41.195,12.634 41.529,12.3 47.645,12.3 47.979,12.634 47.979,13.1 D37.1@48.199,13.32
NetD37_2: D37.2 D38.1 | length 9.3
  Bottom Layer w0.4: D37.2 49.866,13.346 49.866,12.534 50.2,12.2 56.766,12.2 57,12.434 D38.1@57,13.507
NetD38_2: D38.2 D39.1 | length 8.3
  Bottom Layer w0.4: D38.2 58.612,13.1 58.666,13.1 58.666,12.534 59,12.2 64.262,12.2 65.362,13.3 D39.1@65.362,13.4
NetD40_1: D40.1 Q8.1 Q10.3 R14.1 | length 33.3
  Top Layer w0.5: D40.1@29.4,20.75 29.5,20.85 29.5,21.25 30.45,22.2 32.8,22.2 35.8,25.2 47.107,25.2 47.4,24.907 47.4,19.8 ; Q10.3@42.55,17.6 42.575,17.625 44.272,17.625 44.343,17.695 R14.1 ; R14.1@47.4,18 47.4,19.8 ; Q8.1 48.575,19.8 47.4,19.8
NetD40_2: D40.2 D47.1 | length 4.7
  Top Layer w0.5: D47.1 26.7,19.85 26.7,19.75 28.52,17.93 28.52,17.35 28.62,17.25 D40.2@29.2,17.25
NetD41_2: D41.2 D48.1 | length 4.7
  Top Layer w0.5: D48.1@31.655,20.545 32.3,19.9 32.3,19.7 34.1,17.9 34.1,17.35 34.2,17.25 D41.2@34.6,17.25
NetD42_2: D42.2 D43.1 | length 9.4
  Bottom Layer w0.4: D43.1 58.638,64.434 58.873,64.2 65.566,64.2 65.8,64.434 D42.2@65.8,65.47
NetD43_2: D43.2 D44.1 | length 9.2
  Bottom Layer w0.4: D44.1@49.8,65.383 49.8,64.434 50.034,64.2 56.738,64.2 56.972,64.434 D43.2@56.972,65.284
NetD44_2: D44.2 D45.1 | length 9.3
  Bottom Layer w0.4: D45.1@41,65.487 41,64.434 41.234,64.2 47.986,64.2 48.22,64.434 D44.2@48.22,65.232
NetD45_2: D45.2 D46.1 | length 9.5
  Bottom Layer w0.4: D46.1@32.038,65.4 32.038,64.434 32.273,64.2 39.166,64.2 39.4,64.434 D45.2@39.4,65.388
NetJ1_4: J1.4 R9.1 | length 6.6
  Top Layer w1: R9.1@57.6,63.625 J1.4@57.6,70.22
NetJ4_2: J4.2 R10.1 | length 14.8
  Top Layer w0.5: J4.2 59.954,10.694 59.954,11.754 62.2,14 66.6,14 68.2,15.6 68.2,18.705 R10.1
NetJ4_4: J4.4 R11.1 | length 18.9
  Top Layer w0.5: J4.4 57.484,10.764 57.484,11.684 58.4,12.6 59.32,12.6 61.72,15 65.6,15 66.8,16.2 66.8,20.2 65.8,21.2 65.8,21.22 65.62,21.4 R11.1@65.071,21.4
NetJ4_6: J4.6 R12.1 | length 18.2
  Top Layer w0.5: J4.6 55.114,10.934 55.114,11.514 57.8,14.2 59.4,14.2 61.2,16 63,16 63.5,16.5 63.5,20.5 62.77,21.23 61.866,21.23 R12.1@61.6,21.495
NetJP2_2: JP2.2 JP3.2 Q8.3 | length 22.5
  Top Layer w0.5: Q8.3@49.4,21.8 49.732,22.132 49.732,24.332 52.6,27.2 54.65,27.2 60.05,21.8 60.05,19.25 58.98,18.18 58.98,17.58 58.8,17.4 JP2.2@58.8,16.2
NetJP2_3: JP2.3 JP3.3 Q9.3 | length 25.2
  Top Layer w0.5: v1(41.8,23.4) 41.8,23.2 42,23 Q9.3 ; JP2.3@55.4,15.705 55.4,20.8 56.204,21.604 56.204,22.404 v1(56.4,22.6)
  Bottom Layer w0.5: v1(41.8,23.4) 44,21.2 55,21.2 v1(56.4,22.6)
NetQ1_1: Q1.1 R1.2 | length 5.6
  Top Layer w0.5: R1.2@60.23,54.23 60.455,54.23 60.8,54.576 60.8,54.8 62,56 Q1.1@62,59
NetQ2_1: Q2.3 R3.1 R4.1 | length 24.9
  Top Layer w0.5: R3.1@60.4,45.505 R3.1@60.725,45.505 ; R4.1@60.6,27.6 59.6,27.6 58.8,28.4 58.8,34 59.8,35 59.8,37.8 61,39 61,45.23 R3.1@60.725,45.505 ; Q2.3@65.069,45.505 R3.1@60.725,45.505
NetQ2_2: Q2.1 R2.2 | length 3
  Top Layer w0.5: Q2.1@64.8,47.975 65.2,47.975 65.2,48.008 65.493,48.301 R2.2
NetQ3_1: Q3.3 R1.1 | length 3.4
  Top Layer w0.5: R1.1@60.588,51.768 60.8,51.98 62.545,53.725 62.75,53.725 Q3.3@62.75,54.125
NetQ3_2: Q3.1 R3.2 | length 5.2
  Top Layer w0.5: R3.2 60.525,48.101 60.8,48.376 60.8,48.8 62.968,50.968 62.968,51.675 63.05,51.757 Q3.1
NetQ4_1: Q4.1 Q6.3 R6.2 | length 9.5
  Top Layer w0.5: Q4.1@61.8,35.971 61.85,35.921 61.85,34.911 63.429,33.332 63.429,32.625 64.036,32.018 66.418,32.018 67.226,32.826 67.925,32.826 R6.2@68.2,33.101
NetQ5_1: Q5.3 R5.1 R7.1 | length 9.7
  Top Layer w0.5: R7.1@61.03,30.2 61.2,30.03 63.15,28.08 63.15,27.225 63.175,27.2 66,27.2 67.23,25.97 68.134,25.97 R5.1
NetQ5_2: Q5.1 R4.2 | length 3.3
  Top Layer w0.5: R4.2@60.155,25.2 62.975,25.2 63.05,25.125 Q5.1
NetQ6_2: Q6.1 R7.2 | length 4.3
  Top Layer w0.5: R7.2@60.4,32.8 61.026,32.8 61.2,32.626 61.2,32.375 63.2,30.375 Q6.1
NetQ7_2: Q7.1 R8.2 | length 2.8
  Top Layer w0.5: Q7.1 31.825,26.275 32,26.45 32,26.525 32.475,27 R8.2@34.24,27
NetQ8_3: Q8.2 R16.2 | length 2.2
  Top Layer w0.5: R16.2 Q8.2@50.4,19.913
NetQ9_3: Q9.2 R17.2 | length 2.7
  Top Layer w0.5: Q9.2@43.2,19.6 R17.2@45.939,19.6
NetQ10_2: Q10.1 R15.2 | length 5.1
  Top Layer w0.5: R15.2@38,17.4 39,17.4 40.95,15.45 41.95,15.45 Q10.1
NetR9_2: R9.2 U2.1 U4.2 | length 25.8
  Top Layer w0.5: U2.1@34.6,65.22 38,65.22 38.447,64.773 38.447,63.753 39.2,63 51.4,63 52.6,61.8 55,61.8 56.4,60.4 R9.2@57.5,60.4 ; R9.2 R9.2@58.3,60.4
out: R2.1 U1.2 | length 57.8
  Top Layer w0.5: U1.2@34.235,33.965 34.254,33.946 35.854,33.946 36.6,33.2 36.6,26.493 36.893,26.2 49.688,26.2 51.888,28.4 55.725,28.4 v1(58.325,25.8)
  Top Layer w0.7: v1(67.2,43.2) R2.1@67.2,45.705
  Bottom Layer w0.5: v1(58.325,25.8) 58.45,25.8 58.65,25.6 60.2,25.6 67.2,32.6 v1@67.2,42.8
touch: pad.6 U1.4 | length 2.1
  Top Layer w0.4: v1(34.6,38.2) 34.6,38 v1@34.8,37.8
  Top Layer w0.6: U1.4 34.739,36.505 34.739,37.739 v1@34.8,37.8
vcc: C1.2 C2.2 C5.2 D2.1 J2.1 JP1.2 Q2.2 U1.8 U3.1 | length 194.8
  Top Layer w0.6: U3.1@24.65,48.3 24,48.95 24,53.05 D2.1 ; U3.1 24.7,48.05 24.65,48 24.4,48 23.6,47.2 23.6,43.4 ; JP1.2 23.6,14 ; 25.8,32.4 26.505,32.4 26.8,32.695 U1.8 ; U1.8@26.705,32.6 25.8,32.6 23.6,32.6 ; C2.2 28.526,43.4 26.074,43.4 C1.2 25.926,43.4 23.6,43.4 ; v1@36.977,8.2 37.086,8.2 38.086,7.2 42.8,7.2 43.6,8 43.6,11 46.2,13.6 51.8,13.6 53.6,15.4 53.6,22.503 C5.2@53.93,22.833 ; v1(37.2,8) 37.1,8.1 32.9,8.1 31.011,6.211 23.951,6.211 23.6,6.562 23.6,14 ; Q2.2@63.213,47.888 63.25,47.925 63.25,48.45 65,50.2 66.042,50.2 67.4,51.558 v1(67.4,51.6) ; 23.6,14 23.6,32.6 ; 23.6,32.6 23.6,43.4
  Top Layer w1: J2.1@26.2,30.67 26.2,32.4
  Bottom Layer w0.6: v1(37.2,8) 39.1,6.1 69.549,6.1 70,6.551 70,18.8 66.2,22.6 66.2,24.2 68.8,26.8 68.8,50.4 67.6,51.6 v1(67.4,51.6)
vdd: C6.2 D3.2 D4.2 D5.1 D10.1 D15.1 D20.1 D25.1 D30.1 D35.1 D42.1 J1.2 Q1.3 R5.2 R6.1 R13.2 R14.2 | length 300.1
  Top Layer w0.5: v1(34.6,6.6) 35.05,6.15 69.599,6.15 70,6.551 70,26.8 69,27.8 69,28.026 68.725,28.301 R5.2 ; v1(36,10.8) 36.146,10.654 37.046,10.654 39.1,8.6 41.4,8.6 42.4,9.6 42.4,11.2 46.132,14.932 47.232,14.932 R14.2 ; R5.2@68.2,28.301 R6.1@68.2,30.105
  Top Layer w0.6: D3.2@48.674,60.126 49.3,59.5 49.3,59.3 49.8,58.8 59.4,58.8 60.4,59.8 60.4,62
  Top Layer w0.8: C6.2@24.606,70.852 24.314,71.143 24.314,72.116 24.087,72.343 24.069,72.343 23.6,72.812 23.6,78.331 24.069,78.8 51.2,78.8 52.2,77.8 52.2,72.6 53.74,71.06 53.8,71.06 ; C6.2@24.8,71.4 24.8,61 27.45,58.35 27.45,57.7 D4.2 ; R13.2 R13.2@53.675,63.6 ; J1.2 53.8,71.06 ; v1(68,69.6) 68,61 66.4,59.4 66.4,61.531 65.931,62 60.4,62 56.8,62 55.325,63.475 53.8,63.475 R13.2@53.675,63.6 ; R13.2@53.675,63.6 53.8,63.725 53.8,71.06
  Bottom Layer w0.4: 23.6,15.8 26.2,15.8 26.4,15.6 26.4,14.734 ; D25.1 26.362,14.734 26.362,14.5 D5.1 26.445,13.317 26.445,12.534 26.679,12.3 30.566,12.3 30.8,12.534 D35.1@30.8,13.36 ; 26.4,14.5 28.862,14.5 29.962,15.6 D15.1 ; D10.1 63.038,68.566 63.273,68.8 67.302,68.8 ; D30.1@63.438,65.4 63.442,65.404 64.004,65.404 65.1,66.5 66.984,66.5 67.548,67.064 67.574,67.064 ; 67.302,69.2 67.702,69.6 v1(68,69.6)
  Bottom Layer w0.8: C6.2 24.566,71.566 24.566,69.766 23.588,68.788 23.588,16.412 23.6,16.4 23.6,15.8 23.6,6.669 24.069,6.2 33.984,6.2 34.384,6.6 v1(34.6,6.6) 34.6,8.2 35.847,9.447 35.847,10.647 v1(36,10.8)
  Bottom Layer w1: D42.1@67.548,65.65 67.548,67.064 67.548,69.012 68,69.465 v1(68,69.6)
pads on no net: C3.2 Q1.2 Q4.2 U1.3
copper on no net: | length 27.6
  Top Layer w0.5: 45.326,67.8 45.326,68.125 46.543,69.342 46.543,70.343 46.6,70.4 46.6,73 ; v1@54.11,75.904 54.467,76.262 54.467,76.267 55.4,77.2 64.6,77.2 ; 64.6,76.952 65.352,76.952 65.4,77
  Bottom Layer w0.5: 46.8,74.2 46.8,73 v2(48.6,74.8) ; v2@48.4,74.8 49.4,75.8 v1(54.276,75.8)
  other v2: 46.8,70.4 45,71.2 48.6,71.2 44.2,73 49.4,73 66.8,73.2 65,74 68.6,74 45,74.8 46.8,75.6 64.2,75.8 69.4,75.8 65,77.6 68.6,77.6 66.8,78.4

## Polygon pours and split planes (outlines as drawn)
GND on Top Layer "NONET_L01_P024" (hatched 90Degree grid 0.5 track 0.2, shelved, pour order 24): 75.946,71.374 115.697,71.374 115.57,71.247 115.57,9.779 76.073,9.779
GND on Bottom Layer "GND_L02_P026" (hatched 90Degree grid 0.8 track 0.4, pour order 26): 23.2,79 69.6,79 69.6,6 23.401,6

## Keep-outs
Keep-Out Layer:
  lines w0.7: 0,-0.381 0,85 150,85 150,0 0,0

## Silkscreen, mask and mechanical layers (free items; w line width, h text height)
Top Overlay:
  drawing of 107 lines, arcs and shapes, not listed
  text "- KEY+" at 55.4,77.416 h1.52
  text "LED" at 33.4,69.6 h1.7 r270
  text "KEY" at 36.018,69.6 h1.7 r270
  text "GND" at 38.618,69.6 h1.7 r270
  text "ACS" at 41.018,69.6 h1.7 r270
  text "+24" at 31.018,69.4 h1.7 r270
  text "- LED +" at 55.4,66.6 h1.52
  text "53" at 63.1,61.4 h2
  text "56" at 62.8,38.8 h2
  text "SN" at 35.8,29.6 h2.8
  text "W" at 56.1,18.4 h2
  text "Touched" at 60.384,14.6 h1.52 r90
  text "Untouched" at 54.184,14.4 h1.52 r90
  text "G  R  B" at 53.6,12.4 h2.5
Bottom Overlay:
  lines w0.2: 23.6,25.6 23.6,71.6 69.6,71.6 69.6,25.6 23.6,25.6
Drill Guide:
  lines w0.2: 22.914,5.385 70.539,5.385 70.539,79.553 22.914,79.553 22.914,5.385

## Text inside footprints (layer, text, board x,y; h text height)
Buzzer1: Top Overlay "+" at 32.339,12.07 h1.52